# Altium PCB PhaseShifter.PcbDoc (part 2 of 2)
Units mil, origin at the board's own origin, x right, y up, seen from the top; angles counter-clockwise.
Board outline 3600.43 x 2703.44 mil, 4 copper layers (Top Layer, Layer 1, Layer 2, Bottom Layer), stack 62.449 mil thick; 81 components, 31 nets, 219 pads, 360 vias.
Unrouted connection lines stored in the file: 58.
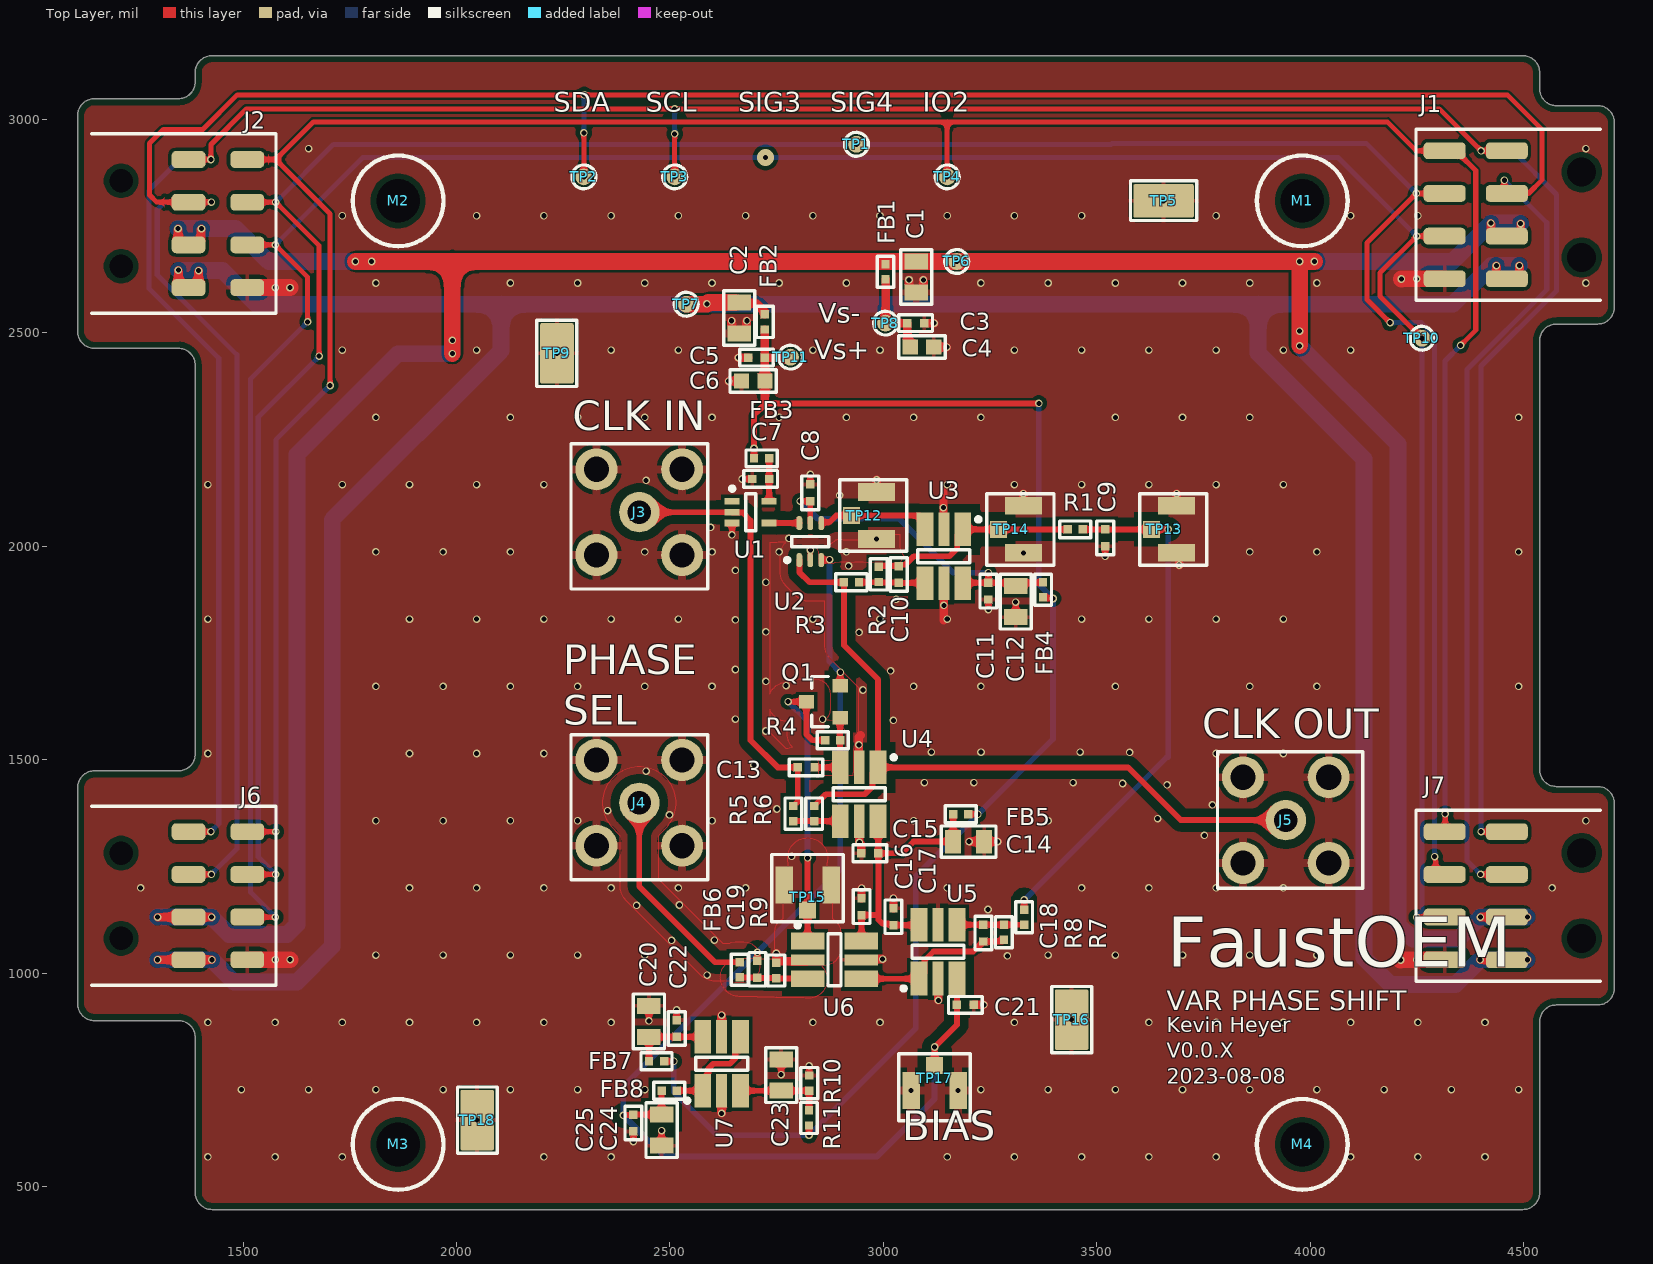
[diagram p0: Top Layer view]

## Part data (continued)
R8 R9: library part "RES 5k10", "贴片电阻 5100Ω ± 1.00% 0.0625W ± 100ppm/℃ 0402", Case Code (Imperial)=0402, Case Code (Metric)=1005, Manufacturer=Yageo, Manufacturer Part Number=RC0402FR-075K1L, Max Operating Temperature=155°C, Max Power Dissipation=63mW, Min Operating Temperature=-55°C, Package Quantity=1, Resistance=5.1kR, Resistance Tolerance=1%, Resistor Type="Thick Film", Supplier Part Number 1=1987834, Temperature Coefficient=100ppm/°C, Voltage Rating=50V, Case/Package=0402, Category="Chip SMD Resistors", ComponentLink1Description=https://datasheet.ciiva.com/7983/1018594-7983519.pdf?src-supplier=Element14, ComponentLink1URL=https://datasheet.ciiva.com/7983/1018594-7983519.pdf?src-supplier=Element14, ComponentLink2Description=https://datasheet.ciiva.com/46394/1018594-46394936.pdf?src-supplier=Element14, ComponentLink2URL=https://datasheet.ciiva.com/46394/1018594-46394936.pdf?src-supplier=Element14, ComponentLink3Description=https://datasheet.ciiva.com/2453/pyu-r-int-thick-7-2453401.pdf?src-supplier=Digi-Key, ComponentLink3URL=https://datasheet.ciiva.com/2453/pyu-r-int-thick-7-2453401.pdf?src-supplier=Digi-Key, ComponentLink4Description=https://datasheet.ciiva.com/2453/pyu-r-int-thick-7-2453402.pdf?src-supplier=Digi-Key, ComponentLink4URL=https://datasheet.ciiva.com/2453/pyu-r-int-thick-7-2453402.pdf?src-supplier=Digi-Key, ComponentLink5Description=https://datasheet.ciiva.com/2453/pyu-r-int-thick-7-2453400.pdf?src-supplier=Digi-Key, ComponentLink5URL=https://datasheet.ciiva.com/2453/pyu-r-int-thick-7-2453400.pdf?src-supplier=Digi-Key, ComponentLink6Description=https://datasheet.ciiva.com/12558/pyu-rc0402-51-rohs-l-6-r-8721-12558460.pdf?src-supplier=Mouser, ComponentLink6URL=https://datasheet.ciiva.com/12558/pyu-rc0402-51-rohs-l-6-r-8721-12558460.pdf?src-supplier=Mouser, ComponentLink7Description=https://datasheet.ciiva.com/16744/pyu-rc0402-51-rohs-l-6-r-16744283.pdf?src-supplier=Future+Electronics, ComponentLink7URL=https://datasheet.ciiva.com/16744/pyu-rc0402-51-rohs-l-6-r-16744283.pdf?src-supplier=Future+Electronics, ComponentLink8Description=https://datasheet.ciiva.com/15189/getdatasheetpartid-323636-15189493.pdf?src-supplier=Verical, ComponentLink8URL=https://datasheet.ciiva.com/15189/getdatasheetpartid-323636-15189493.pdf?src-supplier=Verical, Construction=Rectangular, Depth=0.5mm, Features="Moisture Resistant", Height=0.016inch, Lead Free="Lead Free", Length=1mm, Military Standard=Not, Number of Terminations=2, Packaging="Tape and Reel", Power Rating=63mW, Pricing 1="10000=0.00100 (GBP)", REACH SVHC=Unknown, RoHS=Yes, RoHS Compliant=Yes, Series=RC, Stock 1=27100, Supplier 1=RSComponents, Technology="THICK FILM", Termination=SMD/SMT, Tolerance=1%, Voltage Rating (DC)=50V, Width=0.02inch, Working Voltage=50V
TP1 TP2 TP3 TP4 TP6 TP7 TP8 TP10 TP11: library part "TP 1mm", "SMT testpoint"
TP5 TP9 TP16 TP18: library part "TP CLIP 1206 RCWCTE", "Current Sense Resistors - SMD CHIP CHECKER HT=2.0 1206", Case Code (Imperial)=1206, Case Code (Metric)=3216, Current Rating=2A, Manufacturer="KOA Speer", Manufacturer Part Number=RCWCTE, Max Operating Temperature=125°C, Min Operating Temperature=-55°C, Resistance=0R, Supplier Part Number 1=2019-RCWCTECT-ND, Case/Package=1206, Category="Chip SMD Resistors", ComponentLink1Description=https://datasheet.ciiva.com/34302/1876186-34302940.pdf?src-supplier=Jameco, ComponentLink1URL=https://datasheet.ciiva.com/34302/1876186-34302940.pdf?src-supplier=Jameco, ComponentLink2Description=https://datasheet.ciiva.com/5556/rc-5556236.pdf?src-supplier=Mouser, ComponentLink2URL=https://datasheet.ciiva.com/5556/rc-5556236.pdf?src-supplier=Mouser, ComponentLink3Description=https://datasheet.ciiva.com/26821/getdatasheetpartid-110197-26821157.pdf?src-supplier=Verical, ComponentLink3URL=https://datasheet.ciiva.com/26821/getdatasheetpartid-110197-26821157.pdf?src-supplier=Verical, Depth=1.6mm, Height=2mm, Length=3.2mm, Military Standard=Not, Mount="Surface Mount", Packaging="Tape and Reel", Pricing 1="1=0.16000, 10=0.13700, 25=0.12120, 50=0.11320, 100=0.10500, 250=0.09292, 500=0.08888, 1000=0.07272 (USD)", RoHS=Yes, RoHS Compliant=Yes, Series=RC, Stock 1=282207, Supplier 1=Digi-Key, Termination=SMD/SMT, Width=1.6mm
TP12 TP13 TP14 TP15 TP17: library part "TP U.FL", "CONN U.FL RCPT STR 50 OHM SMD", Case/Package=SMD/SMT, Dielectric Material=Polymer, Housing Color=Beige, Manufacturer=Hirose, Manufacturer Part Number=U.FL-R-SMT-1(80), Max Frequency=6GHz, Max Operating Temperature=90°C, Min Operating Temperature=-40°C, Package Quantity=10000, Body Material=Bronze, Body Plating=Silver, Category="RF / Coaxial Connectors", Center Contact Plating=Gold, ComponentLink1Description=http://www.mouser.com/ds/2/185/U.FL_catalog-939761.pdf?src-supplier=Mouser, ComponentLink1URL=http://www.mouser.com/ds/2/185/U.FL_catalog-939761.pdf?src-supplier=Mouser, ComponentLink2Description=https://www.hirose.com/product/en/download_file/key_name/U.FL-R-SMT-1%2880%29/category/Specification%20Sheet/doc_file_id/37638/?file_category_id=9&item_id=03310472280&is_series=&src-supplier=Digi-Key, ComponentLink2URL=https://www.hirose.com/product/en/download_file/key_name/U.FL-R-SMT-1%2880%29/category/Specification%20Sheet/doc_file_id/37638/?file_category_id=9&item_id=03310472280&is_series=&src-supplier=Digi-Key, Connector Type="Receptacle,Male Pin", Contact Material=Brass, Fastening Type=SNAP-ON, Impedance=50R, Lead Free="Lead Free", Mating Cycles=30, Mount="Surface Mount", Number of Ports=1, Packaging="Tape and Reel", Pricing 1="10000=0.81500, 20000=0.80000, 30000=0.78500 (USD)", RoHS=Yes, RoHS Compliant=Yes, Series=U.FL, Stock 1=40000, Supplier 1="Future Electronics", Termination=Solder
U1: library part "IC LOGIC INVERTER 32mA", "74LVC Series 5.5 V Surface Mount Single Schmitt-Trigger Inverter - SOT-353", Case/Package=SOT-353, High Level Output Current=-32mA, Low Level Output Current=32mA, Manufacturer 1=Diodes, Max Operating Temperature=125°C, Max Supply Voltage=5.5V, Min Operating Temperature=-40°C, Min Supply Voltage=1.65V, Package Quantity=3000, Quiescent Current=200uA, Supplier Part Number 1=9038438, Category 1="Logic Gates", ComponentLink1Description=https://datasheet.ciiva.com/22694/1718765-22694659.pdf?src-supplier=Element14, ComponentLink1URL=https://datasheet.ciiva.com/22694/1718765-22694659.pdf?src-supplier=Element14, ComponentLink2Description=https://datasheet.ciiva.com/1507/1718765-1507989.pdf?src-supplier=Element14, ComponentLink2URL=https://datasheet.ciiva.com/1507/1718765-1507989.pdf?src-supplier=Element14, Description 1="74LVC Series 5.5 V Surface Mount Single Schmitt-Trigger Inverter - SOT-353", Height=1mm, Input Type="SCHMITT TRIGGER", Lead Free="Lead Free", Length=2.2mm, Logic Function="Inverter,Schmitt Trigger", Manufacturer Part Number 1=74LVC1G14SE-7, Mounting Technology="Surface Mount", Number of Circuits=1, Number of Elements=1, Number of Inputs=1, Output Current=32mA, Output Type=PUSH-PULL, Packaging="Tape and Reel", Pins=5, Pricing 1="3000=0.0324, 9000=0.0313, 30000=0.0301, 60000=0.0294, 120000=0.0282 (USD)", Propagation Delay=6.5ns, Radiation Hardening=No, Reach SVHC Compliant=No, RoHS 1=Yes, RoHS Compliant=Yes, Schmitt Trigger Input=Yes, Series=74LVC, Stock 1=741000, Supplier 1="Future Electronics", Technology=CMOS, Turn-On Delay Time=14ns, Width=1.35mm
U2: library part "IC AN SWITCH SPDT 340MHz 15R SN74LVC1G3157DCKR", "5-V, 2: 1 (SPDT), 1-channel general-purpose analog switch 6-SC70 -40 to 125", Case/Package=SC, Manufacturer 1="Texas Instruments", Max Operating Temperature=125°C, Max Supply Current=10uA, Max Supply Voltage=5.5V, Min Operating Temperature=-40°C, Min Supply Voltage=1.65V, Supplier Part Number 1=595-SN74LVC1G3157DCK, -3db Bandwidth=340MHz, Bandwidth=300MHz, Category 1="Interface ICs", ComponentLink1Description=https://datasheet.ciiva.com/34301/756764-34301477.pdf?src-supplier=Jameco, ComponentLink1URL=https://datasheet.ciiva.com/34301/756764-34301477.pdf?src-supplier=Jameco, ComponentLink2Description=https://datasheet.ciiva.com/15127/getdatasheetpartid-187022-15127388.pdf?src-supplier=Verical, ComponentLink2URL=https://datasheet.ciiva.com/15127/getdatasheetpartid-187022-15127388.pdf?src-supplier=Verical, ComponentLink3Description=https://datasheet.ciiva.com/41461/001187224-da-01-en-ic-switch-sn74lvc1g3157dckr-sc-70-6-tid-41461882.pdf?src-supplier=Conrad, ComponentLink3URL=https://datasheet.ciiva.com/41461/001187224-da-01-en-ic-switch-sn74lvc1g3157dckr-sc-70-6-tid-41461882.pdf?src-supplier=Conrad, ComponentLink4Description=https://datasheet.ciiva.com/1514/1857156-1514550.pdf?src-supplier=Element14, ComponentLink4URL=https://datasheet.ciiva.com/1514/1857156-1514550.pdf?src-supplier=Element14, ComponentLink5Description=https://datasheet.ciiva.com/46411/1786793-46411528.pdf?src-supplier=Element14, ComponentLink5URL=https://datasheet.ciiva.com/46411/1786793-46411528.pdf?src-supplier=Element14, ComponentLink6Description=https://datasheet.ciiva.com/1669/sn74lvc1g3157-1669381.pdf?src-supplier=Digi-Key, ComponentLink6URL=https://datasheet.ciiva.com/1669/sn74lvc1g3157-1669381.pdf?src-supplier=Digi-Key, ComponentLink7Description=https://datasheet.ciiva.com/1669/sn74lvc1g3157-1669380.pdf?src-supplier=Digi-Key, ComponentLink7URL=https://datasheet.ciiva.com/1669/sn74lvc1g3157-1669380.pdf?src-supplier=Digi-Key, ComponentLink8Description=https://datasheet.ciiva.com/1669/sn74lvc1g3157-1669382.pdf?src-supplier=Digi-Key, ComponentLink8URL=https://datasheet.ciiva.com/1669/sn74lvc1g3157-1669382.pdf?src-supplier=Digi-Key, ComponentLink9Description=https://datasheet.ciiva.com/14435/sn74lvc1g3157-14435733.pdf?src-supplier=Avnet, ComponentLink9URL=https://datasheet.ciiva.com/14435/sn74lvc1g3157-14435733.pdf?src-supplier=Avnet, Description 1="5-V, 2: 1 (SPDT), 1-channel general-purpose analog switch 6-SC70 -40 to 125", Height=0.9mm, Lead Free="Lead Free", Length=2mm, Manufacturer Part Number 1=SN74LVC1G3157DCKR, Mounting Technology="Surface Mount", Number of Bits=1, Number of Channels=1, Number of Circuits=1, Number of Inputs=1, Number of Outputs=2, Packaging="Tape and Reel", Pins=6, Pricing 1="1=0.34, 10=0.22, 50=0.22, 100=0.118, 1000=0.086, 10000=0.051 (USD)", Propagation Delay=300ps, Radiation Hardening=No, Reach SVHC Compliant=No, RoHS 1=Yes, RoHS Compliant=Yes, Series=-, Stock 1=368361, Supplier 1=Mouser, Supply Current=10uA, Supply Type=Single, Termination=SMD/SMT, Turn-Off Delay Time=3.8ns, Turn-On Delay Time=5.7ns, Weight=8.8E-05oz, Width=1.25mm
U3 U4 U5 U6 U7: library part "IC OPAMP SOT5/6-23 GENERIC", Case/Package=SOT, Category="Amplifiers - Op Amps, Buffer, Instrumentation", Mount="Surface Mount", Number of Channels=1, Number of Circuits=1, Number of Pins=6, RoHS=Yes, RoHS Compliant=Yes

## Via types
v1: diameter 17.72, hole 11.81, Top Layer to Bottom Layer, tented both sides, 359 vias
v2: diameter 39.37/17.72 (per signal layer), hole 11.81, Top Layer to Bottom Layer, tented bottom, 1 vias

## Nets (pads, with @x,y where several pads share a name; then routed paths per layer and width w, separated by ;. In a path a pad name is that pad's centre, name@x,y a point inside that pad or via, vN(x,y) a via of type N, cw(c..) or ccw(c..) an arc to the next point about the centre after c; other vN are vias at no path point)
ALL+: C13.1 Q1.1 R4.2 U4.3 | length 179
  Top Layer w13.59: C13.1 U4.3 2898.7,1482.25 2898.7,1551.71 2898.29,1552.12 2898.29,1597.68 Q1.1 ; 2897.3,1559 2898.29,1558.02
ALL-: R5.1 R6.2 U4.4 | length 110.1
  Top Layer w13.59: R5.1 R6.2 U4.4
BIAS: FB8.2 U7.1 U7.4 | length 246.8
  Top Layer w13.59: FB8.2 U7.1 2589.57,737.21 2589.57,775.59 2601.38,787.4 2640.75,787.4 2652.47,799.12 2652.47,837.51 U7.4
BIAS_REF: C23.2 R10.2 R11.1 U7.3 | length 207.2
  Top Layer w13.59: U7.3 C23.2 R10.2 2825.97,724.23 2825.97,678.33 R11.1
CLK_SCL: J1.1 J2.1 J6.1 J7.1 TP3.1 | length 7025.3
  Top Layer w11.81: J6.1@1364.2,1331.1 v1(1424.58,1331.1) ; J2.1@1364.2,2905.91 v1(1424.58,2905.91) 1424.58,2941.31 1507.87,3024.61 4302.03,3024.61 v1(4400.26,2926.38) 4452.76,2926.38 J1.1 ; v1(2511.07,2865.16) v1(2511.07,2865.16) 2511.12,2965.91 v1(2511.17,2965.95) ; v1(4400.26,1331.1) 4452.76,1331.1 J7.1
  Bottom Layer w11.81: v1(1424.58,1331.1) 1442.91,1349.44 1442.91,2440.5 1279.09,2604.32 1279.09,2833.23 1351.77,2905.91 v1(1424.58,2905.91) ; v1(2511.17,2965.95) v1(2511.17,3024.61) ; v1(4400.26,1331.1) 4400.26,2421.91 4576.77,2598.43 4576.77,2823.82 4474.21,2926.38 v1(4400.26,2926.38)
CLK_SDA: J1.2 J2.2 J6.2 J7.2 TP2.1 | length 7736.9
  Top Layer w11.81: J6.2@1364.2,1231.1 v1(1425.68,1231.1) ; v1(1425.68,2805.91) 1364.2,2805.91 1297.44,2805.91 1280.51,2822.84 1280.51,2943.9 1312.99,2976.38 1405.51,2976.38 1486.43,3057.29 v1(2299.12,3057.29) 4461.76,3057.29 4543.31,2975.75 4543.31,2858.27 4511.42,2826.38 4452.76,2826.38 4454.72,2828.35 v1(4454.72,2857.28) ; v1(2298.23,2865.16) v1(2298.23,2968.18) ; v1(4399.16,1231.1) 4452.76,1231.1 J7.2
  Bottom Layer w11.81: v1(1425.68,1231.1) 1485.24,1290.66 1485.24,2448.82 1298.86,2635.19 1298.86,2789.02 1315.75,2805.91 v1(1425.68,2805.91) ; v1(2298.23,2968.18) 2298.23,3056.4 v1(2299.12,3057.29) ; v1(4399.16,1231.1) 4367.13,1263.14 4367.13,2413.83 4554.13,2600.84 4554.13,2757.87 v1(4454.72,2857.28)
CLOCK: C13.2 J3.1 R5.2 U1.2 | length 1015.1
  Top Layer w13.59: J3.1 U1.2 2646.59,2078.8 2670.34,2078.8 2688.97,2060.17 2688.97,1545.38 2752.51,1481.84 C13.2 2799.26,1401.51 R5.2
GATE: Q1.3 R4.1 TP15.1 U6.1 | length 749.8
  Top Layer w13.59: v1(2776.93,1635.77) Q1.3 2819.55,1635.08 2819.55,1559.6 2833.61,1545.53 R4.1 ; v1(2822.47,1269.68) U6.1 U6.1@2822.83,1075.57
  Bottom Layer w13.59: v1(2776.93,1635.77) 2822.47,1590.24 v1(2822.47,1269.68)
GND: C1.1 C2.1 C3.1 C4.1 C5.1 C6.1 C7.2 C8.2 C9.1 C11.2 C12.1 C14.1 C15.2 C16.2 C17.2 C20.1 C21.1 C22.2 C23.1 C24.1 C25.2 J1.8 J2.8 J3.0 J4.0 J5.0 J6.8 J7.8 R9.2 R10.1 TP5.1 TP9.1 TP12.0 TP13.0 TP14.0 TP15.0 TP16.1 TP17.0 TP18.1 U1.3 U2.2 U3.2 U3.5 U4.2 U4.5 U5.2 U5.5 U6.2 U6.5 U7.2 U7.5 | length 2080
  Top Layer w13.59: v1(2414.37,605.32) C25.2 ; v1(2450.79,887.95) C20.1 ; C24.1 v1(2480.31,630.75) ; C22.2 v1(2515.75,913.39) ; v1(2621.06,671.26) U7.2 ; U7.5 v1(2621.06,901.58) ; v1(2645.24,2026.58) 2645.45,2026.79 2645.45,2053.92 U1.3 ; v1(2669.29,2157.48) C7.2 ; v1(2760.44,761.97) C23.1 ; R10.1 v1(2826.15,782.48) ; U2.2 v1(2828.74,1991.14) ; C8.2 v1(2828.74,2168.31) ; v1(3140.75,2090.55) 3141.24,2090.06 3141.24,2039.86 U3.2 ; v1(3141.73,1861.22) U3.5 ; v1(3246.06,1851.38) C11.2 ; C12.1 v1(3310.03,1868.94) ; v1(3519.68,1976.38) C9.1
  Top Layer w19.68: v1@1609.84,1031.1 v1(1610.19,1031.45) ; v1(2621.06,671.26) U7.2@2621.06,706.19 ; U7.5@2621.06,866.65 v1(2621.06,901.58) ; v1(2637.64,2386.81) C6.1 ; v1(2644.53,2528.19) 2644.53,2506.89 2653.39,2498.03 2670.89,2498.03 2679.75,2506.89 2679.75,2527.98 v1(2679.96,2528.19) ; v1(2660.28,2441.93) C5.1 ; v1(2749.01,1046.26) R9.2 2753.34,1027.95 2819.51,1027.95 U6.2 ; U4.5 2943.56,1355.69 v1(2943.56,1306.05) 2948.49,1301.13 C15.2 ; U4.2 2942.58,1482.66 v1(2942.58,1534.39) 2942.58,1552.82 2946.85,1557.09 ; U6.5 2950.03,1032.48 v1(2998.03,1032.48) ; C16.2 v1(2948.82,1198.82) ; TP12.0@2984.25,2123.31 v1(2984.25,2155.51) ; C17.2 v1(3023.62,1175.2) ; v1(3060.04,2624.02) 3060.04,2603.02 3068.9,2594.16 C1.1 3084.65,2594.16 3093.5,2603.02 v1(3093.5,2624.02) ; C3.1 v1(3119.09,2522.64) ; C4.1 v1(3148.62,2466.54) ; U5.2 3128.94,986.22 v1(3128.94,936.02) ; U3.2@3140.75,2055.63 v1(3140.75,2090.55) 3140.75,2125.48 ; v1@3141.73,1826.29 v1(3141.73,1861.22) U3.5@3141.73,1896.15 ; v1(3200.94,1308.07) C14.1 v1(3267.72,1308.07) ; C21.1 v1(3235.24,925.42) ; v1(3327.91,2123.03) 3327.91,2091.66 TP14.0@3328.74,2090.83 ; TP13.0@3687,1987.91 3692.97,1981.94 v1(3692.97,1955.71) ; TP13.0@3687,2090.83 v1(3687,2123.03)
  Top Layer w39.37: J6.8 v1@1609.84,1031.1 ; J2.8 v1(1575.68,2605.91) v1(1609.84,2605.91) ; v1(4211.61,1030.51) 4212.2,1031.1 J7.8 ; v1(4213.58,2625.99) 4213.98,2626.38 J1.8
  other v1: 1417.32,569.41 1574.8,569.41 1732.28,569.41 2204.72,569.41 2362.2,569.41 3149.61,569.41 3307.09,569.41 3464.57,569.41 3622.05,569.41 3779.53,569.41 4094.49,569.41 4251.97,569.41 4409.45,569.41 2048.23,655.51 3064.96,724.41 3175.2,724.41 1496.06,726.89 1653.54,726.89 1811.02,726.89 1968.5,726.89 2125.98,726.89 2283.46,726.89 2440.94,726.89 3228.35,726.89 3385.83,726.89 3543.31,726.89 3700.79,726.89 3858.27,726.89 4015.75,726.89 4173.23,726.89 4330.71,726.89 4488.19,726.89 1417.32,884.37 1574.8,884.37 1732.28,884.37 1889.76,884.37 2047.24,884.37 2204.72,884.37 2362.2,884.37 2834.65,884.37 2992.13,884.37 3307.09,884.37 3622.05,884.37 3779.53,884.37 3937.01,884.37 4094.49,884.37 4251.97,884.37 4409.45,884.37 3440.94,890.75 2586.87,995.1 1575.68,1031.1 4249.16,1031.1 3290.59,1040.23 1811.02,1041.85 1968.5,1041.85 2125.98,1041.85 2283.46,1041.85 2440.94,1041.85 3385.83,1041.85 3543.31,1041.85 3700.79,1041.85 3858.27,1041.85 4015.75,1041.85 2503.96,1076.43 2604.13,1077.29 3245.06,1148.91 2421.83,1158.56 2522,1159.42 1259.84,1199.33 1889.76,1199.33 2047.24,1199.33 2204.72,1199.33 2362.2,1199.33 2519.68,1199.33 2677.17,1199.33 3149.61,1199.33 3464.57,1199.33 3622.05,1199.33 3779.53,1199.33 3937.01,1199.33 4566.93,1199.33 2785.07,1273.4 3751.94,1322.55 1811.02,1356.81 1968.5,1356.81 2125.98,1356.81 2283.46,1356.81 2598.42,1356.81 3070.87,1356.81 3385.83,1356.81 4645.67,1356.81 3642.67,1361.93 2498.89,1370.71 2354.1,1380.56 2750.4,1384.25 3770.96,1393.99 3664.72,1440.92 3560.54,1444.06 3095.98,1446.12 3212.12,1446.12 3444.42,1446.12 2444.24,1473.19 2696.63,1487.2 1417.32,1514.29 1889.76,1514.29 2047.24,1514.29 2204.72,1514.29 3779.53,1514.29 3937.01,1514.29 3112.49,1517.56 3228.63,1517.56 3460.92,1517.56 3577.07,1517.13 2724.69,1567.07 3023.41,1592.1 2653.25,1594.94 2857.72,1594.6 2951.97,1663.12 1811.02,1671.77 1968.5,1671.77 2125.98,1671.77 2283.46,1671.77 2440.94,1671.77 2598.42,1671.77 3070.87,1671.77 3228.35,1671.77 3543.31,1671.77 3858.27,1671.77 4015.75,1671.77 4488.19,1671.77 2772.11,1673.1 2724.69,1683.22 3016.76,1708.05 2653.25,1711.09 2943.2,1797.93 2724.69,1799.36 2653.25,1827.23 1417.32,1829.25 1889.76,1829.25 2047.24,1829.25 2204.72,1829.25 2362.2,1829.25 2519.68,1829.25 2834.65,1829.25 2992.13,1829.25 3149.61,1829.25 3464.57,1829.25 3622.05,1829.25 3779.53,1829.25 3937.01,1829.25 3029.7,1875.44 2724.69,1915.51 2653.25,1943.38 2918.61,1953.82 3328.74,1984.25 1811.02,1986.73 1968.5,1986.73 2125.98,1986.73 2440.94,1986.73 2598.42,1986.73 2755.91,1986.73 2913.39,1986.73 3858.27,1986.73 4015.75,1986.73 4488.19,1986.73 2984.25,2016.73 2778.55,2018.41 2595.25,2044 2897.41,2119.08 1417.32,2144.21 1732.28,2144.21 1889.76,2144.21 2047.24,2144.21 2204.72,2144.21 3149.61,2144.21 3307.09,2144.21 3464.57,2144.21 3622.05,2144.21 3779.53,2144.21 3937.01,2144.21 2444.24,2154.3 1811.02,2301.69 2125.98,2301.69 2283.46,2301.69 2440.94,2301.69 2598.42,2301.69 2755.91,2301.69 2913.39,2301.69 3070.87,2301.69 3228.35,2301.69 3543.31,2301.69 3700.79,2301.69 3858.27,2301.69 4488.19,2301.69 2235.24,2451.77 1732.28,2459.17 2047.24,2459.17 2362.2,2459.17 2519.68,2459.17 2834.65,2459.17 2992.13,2459.17 3307.09,2459.17 3464.57,2459.17 3622.05,2459.17 3779.53,2459.17 3937.01,2459.17 4094.49,2459.17 1811.02,2616.65 2125.98,2616.65 2283.46,2616.65 2440.94,2616.65 2598.42,2616.65 2755.91,2616.65 2913.39,2616.65 3228.35,2616.65 3385.83,2616.65 3543.31,2616.65 3700.79,2616.65 3858.27,2616.65 4015.75,2616.65 4645.67,2616.65 4249.16,2626.38 1732.28,2774.13 2047.24,2774.13 2204.72,2774.13 2362.2,2774.13 2519.68,2774.13 2677.17,2774.13 2834.65,2774.13 2992.13,2774.13 3149.61,2774.13 3307.09,2774.13 3464.57,2774.13 3779.53,2774.13 4094.49,2774.13 4251.97,2774.13 3656.5,2809.06 1653.54,2931.61 4645.67,2931.61
INV_PWR: C7.1 FB3.1 U1.5 | length 100.4
  Top Layer w13.59: U1.5 C7.1 FB3.1
IO2: J1.5 J2.5 J6.5 J7.5 TP4.1 | length 6427.6
  Top Layer w11.81: J6.5 v1(1576.55,1331.1) ; J2.5 1576.55,2905.91 ; v1(1703.76,2376.4) 1703.76,2778.69 1576.55,2905.91 ; TP4.1 v1(3149.5,2865.16) 3149.5,2994.1 ; J7.5 4316.1,1332.18 v1(4316.1,1373.03) ; J1.5@4325.17,2926.38 J1.5 ; v1(4352.36,2470.47) 4352.36,2470.66 4387.8,2506.09 4387.8,2879.92 4358.33,2909.39 4358.33,2910.47 4342.42,2926.38 J1.5 ; 1576.55,2905.91 1664.74,2994.1 3149.5,2994.1 ; 3149.5,2994.1 4180.57,2994.1 4248.29,2926.38 J1.5
  Bottom Layer w11.81: v1(1576.55,1331.1) 1576.55,2249.19 v1(1703.76,2376.4) ; v1(4316.1,1373.03) 4315.94,1373.19 4315.94,2434.06 v1(4352.36,2470.47)
JFET_PWR: C14.2 C15.1 C16.1 C17.1 FB5.1 U4.6 U5.6 U6.6 | length 684.3
  Top Layer w13.59: U6.6 2948.82,1075.57 C16.1 2986.22,1135.83 2988.28,1137.88 ; U4.6 2987.77,1355.77 C15.1@2987.77,1280.54 ; U5.6 3082.68,1112.2 C17.1 3020.57,1115.25 2998.04,1115.25 2988.28,1125.02 2988.28,1135.83 2988.28,1261.19 2988.28,1280.04 C15.1 C15.1@2987.77,1280.54 ; FB5.1 C14.2 3070.87,1308.07 3043.33,1280.54 C15.1@2987.77,1280.54
NetC22_2: C18.2 R7.1 R8.2 U5.4 | length 157.5
  Top Layer w13.59: U5.4 R7.1
NetFB8_2: FB6.2 J4.1 | length 504.2
  Top Layer w13.59: J4.1 2428.15,1202.76 2605.41,1025.5 FB6.2
nSELECT: U1.4 U2.6 | length 70.9
  Top Layer w13.59: U1.4 U2.6
OP-: C10.2 R2.2 R3.1 U3.4 | length 157.4
  Top Layer w13.59: R3.1 2943.25,1915.7 2987.84,1915.7 R2.2@2988.34,1915.2 ; R2.2 R2.2@2988.34,1915.2 ; U3.4 3096.75,1914.07 C10.2 3035.11,1915.06 2989.87,1915.06 2989.18,1914.37 R2.2@2988.34,1915.2
OP_OUT_: C10.1 R1.2 R2.1 TP14.1 U3.1 | length 497
  Top Layer w13.59: R2.1@2989.18,1953.44 C10.1 3039.14,1956.49 3051.51,1956.49 3071.4,1976.38 3154.66,1976.38 3173.13,1994.85 3173.13,2026.48 U3.1 R1.2
OPAMP_PWR: C20.2 C22.1 FB7.1 U7.6 | length 183.1
  Top Layer w13.59: FB7.1 C20.2 C22.1 U7.6
OPAMP_PWR: C8.1 C11.1 C12.2 FB4.1 U2.5 U3.6 | length 797.7
  Top Layer w13.59: v1@2805.14,2105.34 C8.1 ; U2.5 C8.1 ; U3.6 3187.01,1914.37 C11.1 ; v1(3246.06,1937.99) C11.1 ; 3269.68,1914.25 3269.62,1914.31 ; FB4.1@3374.01,1915.35 3372.97,1914.31 3269.62,1914.31 ; C11.1 3246.12,1914.31 3269.62,1914.31
  Bottom Layer w13.59: v1(2805.12,2105.37) 2846.11,2064.37 3036.56,2064.37 3162.94,1937.99 v1(3246.06,1937.99)
OSIG_GAIN: C18.1 R8.1 U5.1 U6.4 | length 388.8
  Top Layer w13.59: U6.4 3083.07,986.62 U5.1 3096.55,1000.1 3096.55,1029.15 3117.6,1050.2 3210.63,1050.2 C18.1 3278.54,1073.82 R8.1
OSIG_I: C9.2 R1.1 R7.2 TP13.1 | length 1232.1
  Top Layer w13.59: R7.2 v1(3329.73,1171.26) ; R1.1 C9.2 TP13.1 v1(3667.32,2039.37)
  Bottom Layer w13.59: v1(3329.73,1171.26) 3664.37,1505.9 3667.32,1505.9 v1(3667.32,2039.37)
PHASE_DELAY: J5.1 R3.2 R6.1 U2.1 U4.1 | length 1821.8
  Top Layer w13.59: U2.1 2803.18,1967.48 2803.18,1938.94 2826.77,1915.35 R3.2 2907.48,1767.72 2987.69,1687.51 U4.1 ; R6.1 2865.25,1418.85 2956.33,1418.85 2974.8,1437.32 2974.8,1468.95 U4.1 ; J5.1 3696.85,1358.27 3573.28,1481.84 U4.1
PHASE_SHIFT: C19.1 FB6.1 R9.1 U6.3 | length 162.7
  Top Layer w13.59: FB6.1 2663.51,989.62 2704.28,989.62 C19.1 2705.21,988.68 2748.52,988.68 R9.1 2749.8,987.4 2821.68,987.4 U6.3@2823.82,985.26
SIG3: J1.7 J2.7 J6.7 J7.7 TP10.1 | length 6459.8
  Top Layer w11.81: J6.7 v1(1575.57,1131.1) ; J2.7 v1(1575.57,2705.91) 1651.13,2630.35 v1(1651.13,2525.49) ; v1(4249.26,1131.1) J7.7 ; v1(4261.81,2487.2) 4163.39,2585.63 4163.39,2640.5 v1(4249.26,2726.38) J1.7
  Bottom Layer w11.81: v1(1575.57,1131.1) 1517.72,1188.96 1517.72,2392.07 v1(1651.13,2525.49) ; v1(1575.57,2705.91) 1780.1,2910.43 v2(2723.92,2910.43) 4065.21,2910.43 v1(4249.26,2726.38) ; v1(4249.26,1131.1) 4249.26,1132.7 4261.81,1145.25 v1(4261.81,2487.2)
SIG4: J1.6 J2.6 J6.6 J7.6 TP1.1 | length 6436.7
  Top Layer w11.81: J6.6 v1(1576.17,1231.1) ; J2.6 v1(1576.17,2805.91) 1678.15,2703.93 v1(1678.15,2445.24) ; v1(4187.01,2523.62) 4132.87,2577.76 4132.87,2710.59 v1(4248.66,2826.38) J1.6 ; v1(4291.34,1272.64) 4291.34,1271.04 4293.81,1268.57 4293.81,1244.58 4307.29,1231.1 J7.6
  Bottom Layer w11.81: v1(1576.17,1231.1) 1535.43,1271.84 1535.43,2302.52 v1(1678.15,2445.24) ; v1(1576.17,2805.91) 1711.21,2940.95 2936.17,2940.95 v1(2936.76,2941.53) 3533.57,2941.53 3535.93,2943.9 4131.14,2943.9 v1(4248.66,2826.38) ; v1(4187.01,2523.62) 4260.41,2523.62 4291.34,2492.7 v1(4291.34,1272.64)
SWITCH_OUT: TP12.1 U2.4 U3.3 | length 276.5
  Top Layer w13.59: U2.4 2854.33,2056.01 2854.41,2056.09 2873.61,2056.09 2889.36,2071.85 3084.55,2071.85 3097.44,2058.96 U3.3
Vbias: C19.2 C21.2 C24.2 C25.1 FB8.1 Q1.2 TP17.1 U2.3 U5.3 | length 2916
  Top Layer w13.59: v1(2390.75,666.55) 2391.54,667.34 2413.4,667.34 C25.1 C24.2 FB8.1 ; C19.2 v1(2704.72,1048.23) ; U2.3 2854.33,1967.93 2854.41,1968.01 2873.52,1968.01 v1(2874.02,1968.5) ; Q1.2 Q1.2 2899.04,1704.61 v1(2899.1,1704.67) ; TP17.1 v1(3120.08,826.77) 3172.24,878.94 U5.3 U5.3@3174.41,985.04
  Bottom Layer w13.59: v1(2874.02,1968.5) 2874.02,1729.75 v1(2899.1,1704.67) 2899.1,1242.6 v1(2704.72,1048.23) 2390.75,734.25 v1(2390.75,666.55) 2487.41,569.88 2984.25,569.88 3120.08,705.71 v1(3120.08,826.77)
Vs+: C5.2 C6.2 FB2.1 FB3.2 FB4.2 FB5.2 FB7.2 R11.2 TP11.1 | length 3503.6
  Top Layer w13.59: FB7.2 v1(2508.86,793.3) ; FB3.2 v1(2696.85,2229.33) 2696.85,2307.24 2722.44,2332.84 ; 2722.44,2334.65 v1(3364.17,2334.65) ; v1(2825.79,620.08) R11.2 ; FB5.2 v1(3221.46,1372.04) ; FB4.2 3375.63,1878.3 3396.84,1878.3 v1(3397.63,1877.51)
  Top Layer w19.68: 2722.44,2332.68 2722.44,2332.84 C5.2 ; FB2.1 C5.2 ; TP11.1 cw(c2781.5,2442.91) 2781.5,2441.93 C5.2
  Bottom Layer w13.59: v1(2508.86,793.3) 2508.86,721.46 2610.24,620.08 v1(2825.79,620.08) 3076.01,870.3 3076.01,1226.6 v1(3221.46,1372.04) 3397.63,1548.22 v1(3397.63,1877.51) 3364.17,1910.97 v1(3364.17,2334.65)
Vs-: C3.2 C4.2 FB1.1 TP8.1 | length 213.6
  Top Layer w19.68: C4.2 3056.1,2473.43 C3.2 TP8.1 3005.23,2522.95 3005.23,2624.69 FB1.1 ; FB1.1 3005.23,2625.31 FB1.1
Vsin+: C2.2 FB2.2 J1.4 J2.4 J6.4 J7.4 TP7.1 | length 8071.2
  Top Layer w19.68: v1(1299.61,1031.1) 1364.2,1031.1 v1(1426.57,1031.1) ; v1(1348.43,2646.65) 1348.43,2615.75 1358.27,2605.91 1385.83,2605.91 1395.67,2615.75 v1(1395.67,2645.67) ; C2.2 2664,2568.9 2702.39,2568.9 2722.44,2548.85 FB2.2 ; v1(4398.26,1031.1) 4452.76,1031.1 v1(4508.54,1031.1) ; v1(4436.02,2657.48) 4436.02,2636.22 4445.87,2626.38 4480.31,2626.38 4490.16,2636.22 v1(4490.16,2657.48)
  Top Layer w39.37: v1(2538.22,2566.93) 2585.95,2566.93 v1(2586.6,2567.58) 2589.76,2570.74 C2.2@2654.16,2570.74
  Bottom Layer w19.68: 3311.04,2561.71 3316.27,2566.93
  Bottom Layer w39.37: v1(1299.61,1031.1) v1(1426.57,1031.1) 1478.35,979.33 1625.98,979.33 1708.66,1062.01 1708.66,2062.01 2104.33,2457.68 2104.33,2566.93 ; v1(1348.43,2646.65) 1394.69,2646.65 v1(1395.67,2645.67) 1451.77,2645.67 1530.51,2566.93 2104.33,2566.93 ; v1(4490.16,2657.48) 4424.72,2657.48 4393.61,2626.38 4334.16,2566.93 3877.95,2566.93 ; v1(4508.54,1031.1) v1(4398.26,1031.1) 4340.58,973.43 4187.99,973.43 4125.98,1035.43 4125.98,2204.72 3877.95,2452.76 3877.95,2566.93 ; 2104.33,2566.93 v1(2538.22,2566.93) 2585.95,2566.93 v1(2586.6,2567.58) 2587.26,2566.93 3316.27,2566.93 3877.95,2566.93
Vsin-: C1.2 FB1.2 J1.3 J2.3 J6.3 J7.3 TP6.1 | length 7945.6
  Top Layer w19.68: v1(1299.61,1131.1) 1364.2,1131.1 v1(1426.01,1131.1) ; v1(1347.44,2744.09) 1347.44,2715.75 1357.28,2705.91 1391.76,2705.91 1401.61,2715.75 1401.61,2743.14 v1(1402.56,2744.09) ; v1(4398.82,1131.1) 4452.76,1131.1 v1(4508.54,1131.1) ; v1(4423.23,2756.89) 4423.23,2736.22 4433.07,2726.38 4483.27,2726.38 4493.11,2736.22 v1(4493.11,2755.91)
  Top Layer w39.37: v1(1763.05,2667) v1(1801.01,2667) 1990.16,2667 ; v1(1990.16,2451.01) v1(1990.16,2482.28) 1990.16,2667 ; v1(3975.39,2469.51) v1(3975.39,2503.94) v1(3975.39,2667) ; v1(4009.84,2667) v1(3975.39,2667) ; 1990.16,2667 3004.92,2667 3005.53,2667 C1.2 v1(3171.84,2667) v1(3975.39,2667)
  Bottom Layer w39.37: v1(1299.61,1131.1) v1(1426.01,1131.1) 1466.56,1090.55 1602.92,1090.55 1625.98,1113.61 1625.98,2214.57 1862.43,2451.01 v1(1990.16,2451.01) v1(1990.16,2482.28) ; v1(1347.44,2744.09) 1482.87,2744.09 1559.97,2667 v1(1801.01,2667) ; v1(3975.39,2503.94) v1(3975.39,2469.51) 4205.71,2239.2 4205.71,1114.17 4240.16,1079.73 4347.45,1079.73 v1(4398.82,1131.1) v1(4508.54,1131.1) ; v1(3975.39,2667) v1(4009.84,2667) 4333.34,2667 v1(4423.23,2756.89) 4492.13,2756.89 v1(4493.11,2755.91)
pads on no net: J1.0 J2.0 J6.0 J7.0 M1.1 M2.1 M3.1 M4.1 U1.1

## Polygon pours and split planes (outlines as drawn)
GND on Bottom Layer (solid, pour order 15): 170 vertices, not listed, extent 2730.05,1222.8 2869.35,1682.73
GND on Bottom Layer "NONET_L-01_P-001" (solid, pour order 8): 42 vertices, not listed, extent 1112.2,-0.24 4712.63,3149.37
GND on Top Layer (solid, pour order 17): 185 vertices, not listed, extent 2618.29,940.49 2868.6,1034.84
GND on Top Layer (solid, pour order 16): 304 vertices, not listed, extent 2903.68,941.76 3374.5,1158.05
GND on Top Layer (solid, pour order 14): 170 vertices, not listed, extent 2342.89,977.72 2710.84,1483.88
GND on Top Layer (solid, pour order 13): 106 vertices, not listed, extent 2745.17,1017.58 2899.77,1316.64
GND on Top Layer (solid, pour order 12): 196 vertices, not listed, extent 2733.83,1458.13 2942.83,2009.27
GND on Top Layer (solid, pour order 11): 51 vertices, not listed, extent 2733.83,1526.7 2786.63,1617.71
GND on Top Layer (solid, pour order 10): 525 vertices, not listed, extent 2342.89,1273.01 4028.17,2164.98
GND on Top Layer (solid, pour order 9): 72 vertices, not listed, extent 2840.85,1959.96 3048.48,2026.99
GND on Top Layer "NONET_L-01_P-001" (solid, pour order 7): 42 vertices, not listed, extent 1112.2,-0.24 4712.63,3149.37
GND on Layer 2 (split plane): 327 vertices, not listed, extent 1132.26,465.98 4692.58,3129.32
GND on Layer 1 (split plane): 327 vertices, not listed, extent 1132.26,465.98 4692.58,3129.32

## Other copper
Layer 1 (plane layer: these items are gaps in the copper):
  lines w10: 4019.11,1355.31 4019.11,1458.66 4043.3,1458.66
Layer 2 (plane layer: these items are gaps in the copper):
  lines w10: 4019.11,1355.31 4019.11,1458.66 4043.3,1458.66

## Silkscreen, mask and mechanical layers (free items; w line width, h text height)
Top Overlay:
  text "SDA" at 2227.36,3002.62 h78.74
  text "SCL" at 2443.52,3002.62 h78.74
  text "SIG3" at 2659.68,3002.62 h78.74
  text "SIG4" at 2875.83,3002.62 h78.74
  text "IO2" at 3091.99,3002.62 h78.74
  text "Vs-" at 2847.44,2508.53 h78.74
  text "Vs+" at 2837.6,2422.9 h78.74
  text "CLK IN" at 2272.72,2248.58 h118.11
  text "PHASE  / SEL" at 2249.82,1558.62 h118.11
  text "CLK OUT" at 3746.77,1527.13 h118.11
  text "FaustOEM" at 3665.35,976.38 h200
  text "VAR PHASE SHIFT" at 3664.44,897.53 h78.74
  text "Kevin Heyer / V0.0.X / 2023-08-08" at 3664.37,729.46 h60
  text "BIAS" at 3044.29,584.79 h118.11
Board:
  lines w7.87: 4497.28,3149.37 1427.17,3149.37 ccw(c1427.17,3110) 1387.8,3110 1387.8,3087.78 cw(c1348.43,3087.78) 1348.43,3048.41 1151.57,3048.41 ccw(c1151.57,3009.04) 1112.2,3009.04 1112.2,2755.91 1112.2,2502.77 ccw(c1151.57,2502.77) 1151.57,2463.4 1348.43,2463.4 cw(c1348.43,2424.03) 1387.8,2424.03 1387.8,1512.98 cw(c1348.43,1512.98) 1348.43,1473.61 1151.57,1473.61 ccw(c1151.57,1434.24) 1112.2,1434.24 1112.2,1181.1 1112.2,927.97 ccw(c1151.57,927.97) 1151.57,888.6 1348.43,888.6 cw(c1348.43,849.23) 1387.8,849.23 1387.8,485.3 ccw(c1427.17,485.3) 1427.17,445.93 4498.03,445.93 ccw(c4498.03,485.3) 4537.4,485.3 4537.4,885.83 cw(c4576.77,885.83) 4576.77,925.2 4673.26,925.2 ccw(c4673.26,964.57) 4712.63,964.57 4712.63,1181.1 4712.63,1397.64 ccw(c4673.26,1397.64) 4673.26,1437.01 4576.77,1437.01 cw(c4576.77,1476.38) 4537.4,1476.38 4537.4,2481.1 cw(c4576.77,2481.1) 4576.77,2520.47 4673.26,2520.47 ccw(c4673.26,2559.84) 4712.63,2559.84 4712.63,2776.38 4712.63,2992.91 ccw(c4673.26,2992.91) 4673.26,3032.28 4576.77,3032.28 cw(c4576.77,3071.65) 4537.4,3071.65 4537.4,3110 ccw(c4498.03,3110) 4498.03,3149.37 ; 4537.4,3068.89 4537.4,3069.26